# EAGLE board ghc-silk (EAGLE 7.6.0)
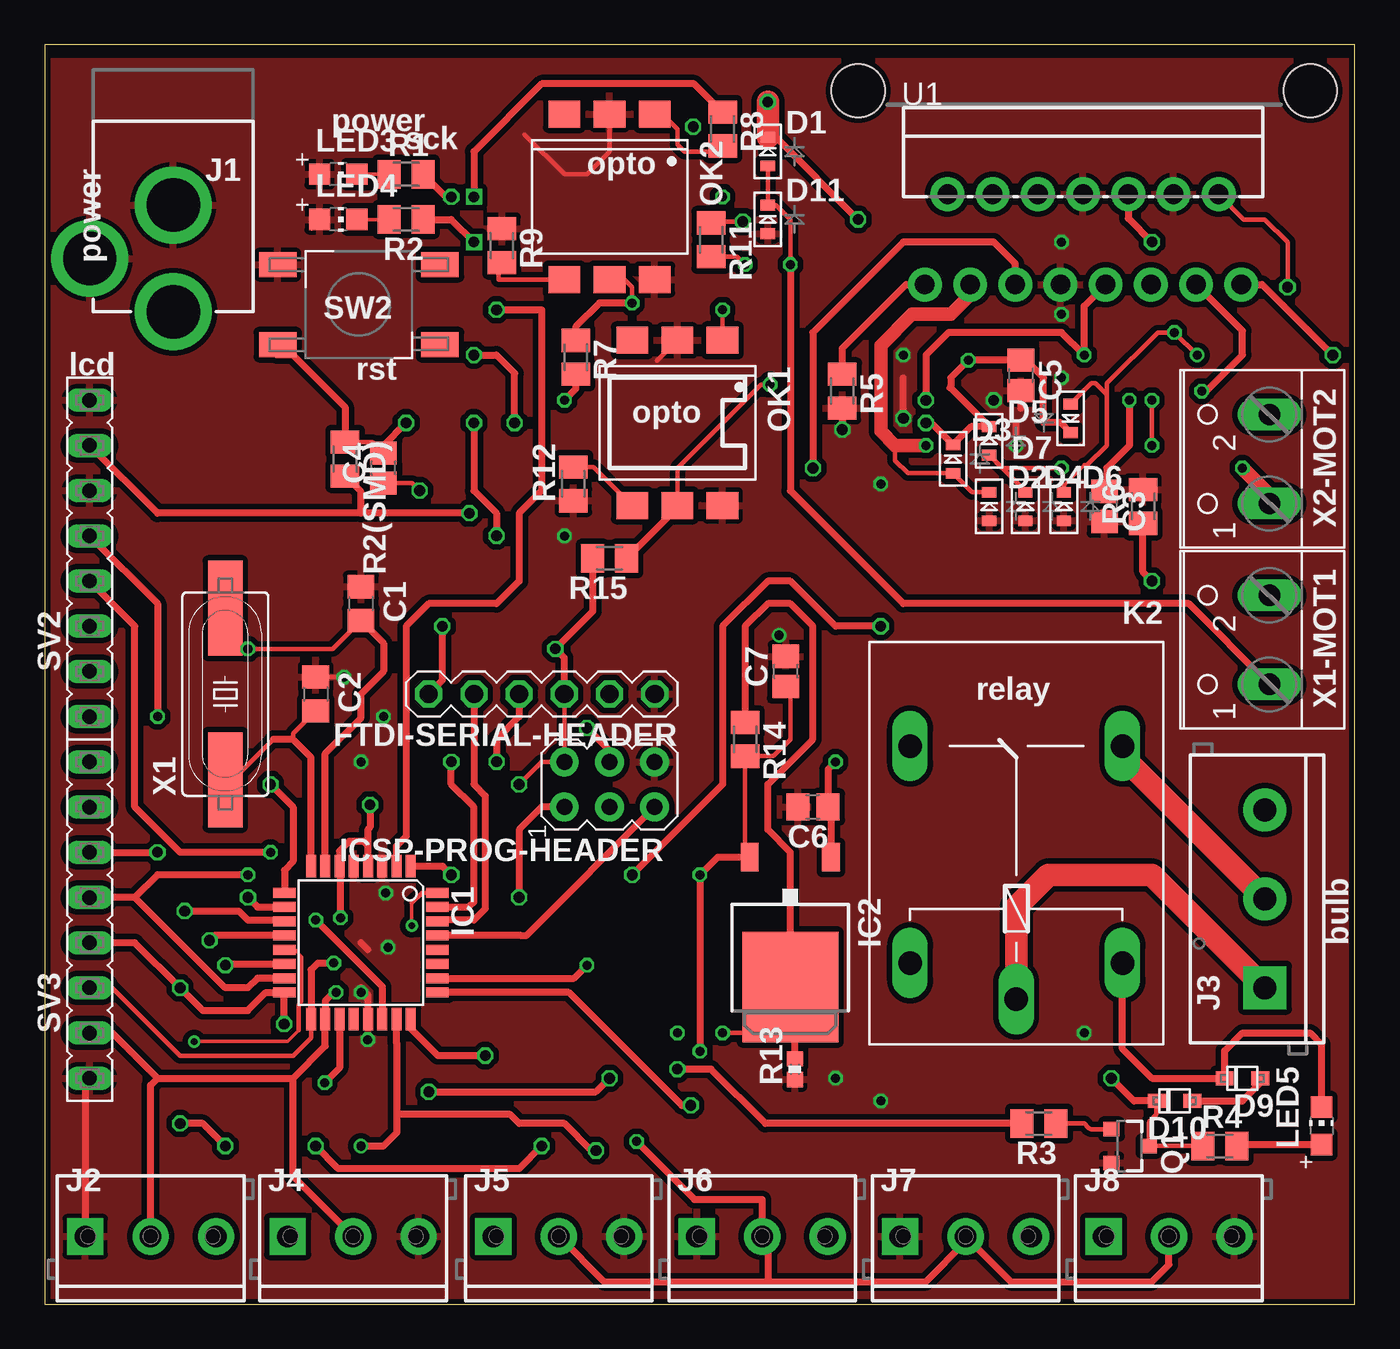
[diagram p0: board, top side]
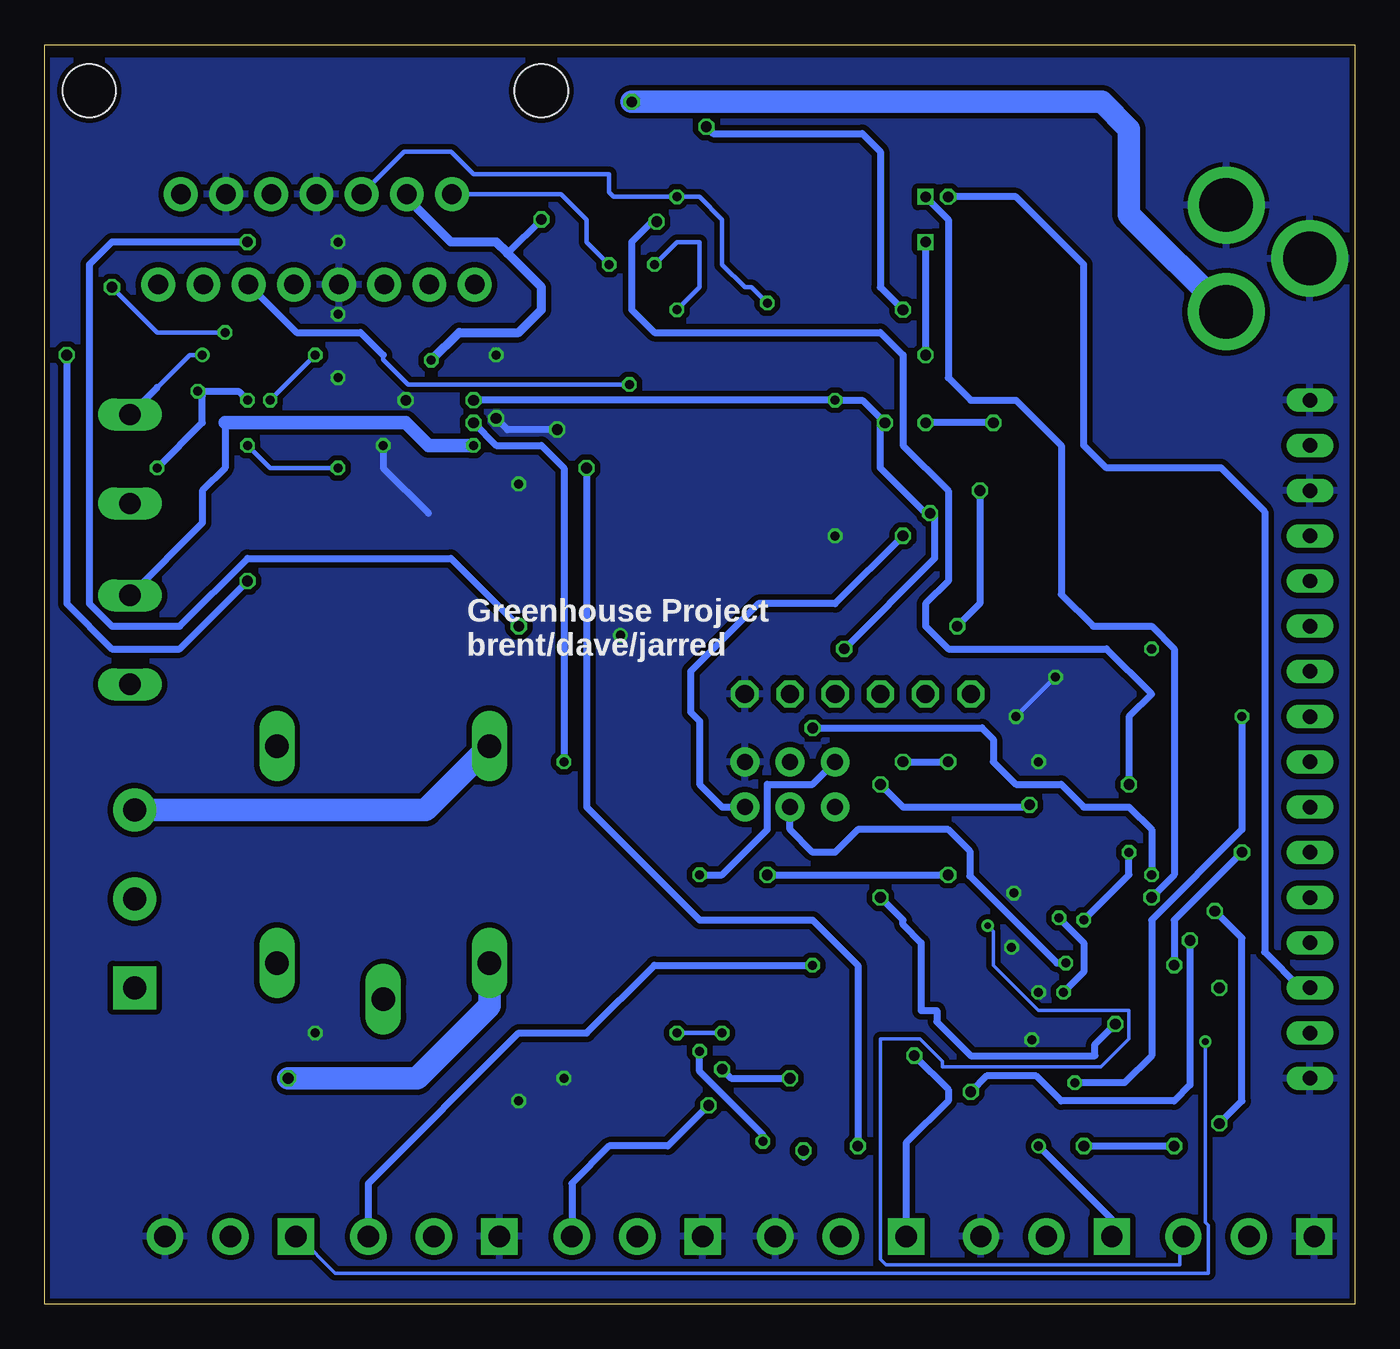
[diagram p1: board, bottom side, seen from below]

Size 73.64 x 70.79 mm. Coordinates in mm from the lower left corner, seen from the top.
Outline: 0,0 73.64,0 73.64,70.79 0,70.79 0,0
Copper layers (1*16): Top 0.035mm / dielectric 1.5mm / Bottom 0.035mm
Design rules "Dirty8TS *": minimum track width 8mil, minimum drill 15mil, track to track 8mil, track to pad 8mil, pad to pad 8mil, via to via 8mil, smd to smd 0mil, copper to edge 10mil, drill to drill 10mil, minimum pad ring 10mil, minimum via ring 6mil, stop-mask expansion 2mil, vias tented up to drill 25mil, thermal gap 10mil

## Footprints (pad centres in the part's own frame; a part is rotated, then mirrored left to right if it is on the bottom)
C0805 = smd 1.3 x 1.5: 1 -0.95,0; 2 0.95,0
C0805' = smd 1.3 x 1.5: 1 -0.85,0; 2 0.85,0
SOD-523 = smd 0.8 x 0.6: A 0,-0.8; K 0,0.8
SOD-323F = smd 1 x 0.8: A -1,0; C 1,0
06X1-PTH = drill 1.016 octagon: 1 -6.35,0; 2 -3.81,0; 3 -1.27,0; 4 1.27,0; 5 3.81,0; 6 6.35,0
TQFP32-08 = smd 1.27 x 0.559: 1 -4.293,2.8; 2 -4.293,2; 3 -4.293,1.2; 4 -4.293,0.4; 5 -4.293,-0.4; 6 -4.293,-1.2; 7 -4.293,-2; 8 -4.293,-2.8; 17 4.293,-2.8; 18 4.293,-2; 19 4.293,-1.2; 20 4.293,-0.4; 21 4.293,0.4; 22 4.293,1.2; 23 4.293,2; 24 4.293,2.8 | smd 0.559 x 1.27: 9 -2.8,-4.293; 10 -2,-4.293; 11 -1.2,-4.293; 12 -0.4,-4.293; 13 0.4,-4.293; 14 1.2,-4.293; 15 2,-4.293; 16 2.8,-4.293; 25 2.8,4.293; 26 2,4.293; 27 1.2,4.293; 28 0.4,4.293; 29 -0.4,4.293; 30 -1.2,4.293; 31 -2,4.293; 32 -2.8,4.293
TO252 = smd 1 x 1.6: 1 -2.28,-4.8; 2 2.28,-4.8 | smd 5.4 x 6.2: 3 0,2.5
AVRISP = drill 0.9 pad 1.626: 1 -1.27,2.54; 2 1.27,2.54; 3 -1.27,0; 4 1.27,0; 5 -1.27,-2.54; 6 1.27,-2.54
POWER_JACK_PTH = drill 2.997 pad 4.318: GND 0,7.7; GNDBREAK 4.7,10.7; PWR 0,13.7
SCREWTERMINAL-3.5MM-3_LOCK.007S = drill 1.2 pad 2.032 square: 1 -0.178,0 | drill 1.2 pad 2.032: 2 3.5,0; 3 7.178,0
SCREWTERMINAL-5MM-3 = drill 1.3 pad 2.413 square: 1 0,0 | drill 1.3 pad 2.413: 2 5,0; 3 10,0
G5LE = drill 1.321 long: 1 -7.493,-5.969; 2 -7.493,5.969; O 4.699,5.969; P -9.525,0; S 4.699,-5.969
CHIP-LED0805 = smd 1.2 x 1.2: A 0,-1.05; C 0,1.05
DIL6-SMD = smd 1.78 x 1.52: 1 -2.54,-4.645; 2 0,-4.645; 3 2.54,-4.645; 4 2.54,4.645; 5 0,4.645; 6 -2.54,4.645
SOT23-3 = smd 0.8 x 0.9: 1 -0.95,-1; 2 0.95,-1; 3 0,1.1
M0805 = smd 1.3 x 1.6: 1 -0.95,0; 2 0.95,0
0402-RES = smd 0.85 x 0.9: 1 -0.58,0; 2 0.58,0
FE08 = drill 0.813 long: 1 -8.89,0; 2 -6.35,0; 3 -3.81,0; 4 -1.27,0; 5 1.27,0; 6 3.81,0; 7 6.35,0; 8 8.89,0
SPST_NO_SMD = smd 2.108 x 1.397: 1 0,4.496; 2 9.119,4.496; 3 0,0; 4 9.119,0
MULTIWATT15_6400BGHEATSINK = drill 1.1 pad 1.9: 1 -8.95,-2.39; 2 -7.68,2.69; 3 -6.41,-2.39; 4 -5.14,2.69; 5 -3.87,-2.39; 6 -2.6,2.69; 7 -1.33,-2.39; 8 -0.06,2.69; 9 1.21,-2.39; 10 2.48,2.69; 11 3.75,-2.39; 12 5.02,2.69; 13 6.29,-2.39; 14 7.56,2.69; 15 8.83,-2.39 | hole 2.997: -12.7,8.509; 12.7,8.509
HC49UP = smd 5.334 x 1.93: 1 -4.826,0; 2 4.826,0
W237-102 = drill 1.194 long: 1 -2.5,-1.27; 2 2.5,-1.27

## Placement (x,y rotation side)
C1  20pF  [C0805]  17.78,39.37 270 top
C2  20pF  [C0805]  15.24,34.29 270 top
C3  1.0uF  [C0805']  59.56,44.83 270 top
C4  0.1uF  [C0805']  19.05,46.99 90 top
C5  1.0uF  [C0805']  54.86,52.2 270 top
C6  0.1uF  [C0805']  43.18,27.94 180 top
C7  0.1uF  [C0805']  41.66,35.56 90 top
D1  [SOD-523]  40.64,64.77 0 top
D2  [SOD-523]  53.09,44.83 0 top
D3  [SOD-523]  51.05,47.5 0 top
D4  [SOD-523]  55.12,44.83 0 top
D5  [SOD-523]  53.09,48.51 0 top
D6  [SOD-523]  57.28,44.83 0 top
D7  [SOD-523]  57.66,49.78 180 top
D9  1N4148  [SOD-323F]  67.31,12.7 180 top
D10  Zener  [SOD-323F]  63.5,11.43 180 top
D11  [SOD-523]  40.64,60.96 0 top
FTDI-SERIAL-HEADER  HEADER-06X1-MALE  [06X1-PTH]  27.94,34.29 180 top
IC1  ATMEGA168TQFP-08  [TQFP32-08]  17.78,20.32 270 top
IC2  7805DT  [TO252]  41.91,20.32 180 top
ICSP-PROG-HEADER  AVRISP-6  [AVRISP]  31.75,29.21 90 top
J1  POWER_JACKPTH  [POWER_JACK_PTH]  7.24,69.47 180 top
J2  [SCREWTERMINAL-3.5MM-3_LOCK.007S]  2.46,3.81 0 top
J3  [SCREWTERMINAL-5MM-3]  68.58,17.78 90 top
J4  [SCREWTERMINAL-3.5MM-3_LOCK.007S]  13.84,3.81 0 top
J5  [SCREWTERMINAL-3.5MM-3_LOCK.007S]  25.4,3.81 0 top
J6  [SCREWTERMINAL-3.5MM-3_LOCK.007S]  36.83,3.81 0 top
J7  [SCREWTERMINAL-3.5MM-3_LOCK.007S]  48.26,3.81 0 top
J8  [SCREWTERMINAL-3.5MM-3_LOCK.007S]  59.69,3.81 0 top
K2  G5LE  [G5LE]  54.61,26.67 90 top
LED3  [CHIP-LED0805]  16.51,63.5 270 top
LED4  [CHIP-LED0805]  16.51,60.96 270 top
LED5  [CHIP-LED0805]  71.75,10.03 0 top
OK1  4N27SM  [DIL6-SMD]  35.56,49.53 180 top
OK2  4N27SM  [DIL6-SMD]  31.75,62.23 180 top
Q1  MMBT2222A  [SOT23-3]  60.96,8.89 270 top
R1  150  [M0805]  20.32,63.5 0 top
R2  150  [M0805]  20.32,60.96 180 top
R2(SMD)  10k  [M0805]  16.89,47.5 270 top
R3  1k  [M0805]  55.88,10.16 180 top
R4  150  [M0805]  66.04,8.89 0 top
R5  10k  [M0805]  44.83,51.31 270 top
R6  10k  [M0805]  61.72,44.83 90 top
R7  1k  [M0805]  29.84,53.21 270 top
R8  240  [M0805]  38.1,66.04 270 top
R9  1k  [M0805]  25.7,59.49 270 top
R11  240  [M0805]  37.47,59.82 270 top
R12  1k  [M0805]  29.72,46.1 90 top
R13  3k  [0402-RES]  42.16,13.21 90 top
R14  1k  [M0805]  39.37,31.75 270 top
R15  1k  [M0805]  31.75,41.91 180 top
SV2  [FE08]  2.54,41.91 90 top
SV3  [FE08]  2.54,21.59 90 top
SW2  MOMENTARYBUTTON  [SPST_NO_SMD]  22.23,58.42 180 top
U1  L298HEATSINK  [MULTIWATT15_6400BGHEATSINK]  58.42,59.69 0 top
X1  [HC49UP]  10.16,34.29 90 top
X1-MOT1  [W237-102]  67.56,37.34 90 top
X2-MOT2  [W237-102]  67.56,47.5 90 top

## Library data of the parts
C1 C2 = resistor
C3-C7 D1-D7 D10 D11 ICSP-PROG-HEADER LED3-LED5 R1 R2 R2(SMD) R3-R9 R11 R12 R14 R15 = adafruit
D9 = adafruit; PROD_ID: DIO-08378
FTDI-SERIAL-HEADER = GeekAmmo; OTHER: 4UCON 00834; URL: http://www.4uconnector.com/online/SearchPro.asp?FormName=ProSearch&FormAction=search&s_GroupNo=&s_keyword=00834
IC1 = atmega328p
IC2 SW2 = ece388
J1 = SparkFun-Connectors; PROD_ID: CONN-08197
J2 J4-J8 = SparkFun-Connectors; PROD_ID: CONN-08288
J3 = SparkFun-Connectors; PROD_ID: CONN-10134; STOREFRONT_ID: PRT-08433
K2 = relay; OC_FARNELL: unknown; OC_NEWARK: unknown
OK1 OK2 = optocoupler; MF: FAIRCHILD SEMICONDUCTOR; MPN: 4N27S-M; OC_FARNELL: unknown; OC_NEWARK: 05C3300
Q1 = SparkFun-DiscreteSemi; PROD_ID: TRANS-08049
R13 = SparkFun-Resistors
SV2 SV3 = con-lsta; OC_FARNELL: unknown; OC_NEWARK: unknown
U1 = SparkFun-PowerIC
X1 = adafruit; OC_FARNELL: unknown; OC_NEWARK: unknown
X1-MOT1 X2-MOT2 = con-wago-500; MPN: 237-102; OC_FARNELL: unknown; OC_NEWARK: 70K9898

## Nets
+5V: C3.1 C7.1 FTDI-SERIAL-HEADER.3 IC1.4 IC1.6 IC1.18 IC2.2 ICSP-PROG-HEADER.2 J2.2 J4.2 J5.2 J6.2 J7.2 J8.2 R2(SMD).2 R2.1 R7.2 R14.2 R15.2 SV2.7 SV3.2 U1.9
+12V: C5.1 C6.1 D1.K D3.K D5.K D7.K IC2.1 J1.PWR U1.4
ADC6: IC1.19 SV2.5
ADC7: IC1.22 SV2.4
COIL: D10.C K2.2 Q1.3 R4.1
COMMON: J3.1 K2.P
CTS(DOESNTEXIST): FTDI-SERIAL-HEADER.2
DIODENODE: D9.A D10.A
DTR: C4.1 FTDI-SERIAL-HEADER.6
ENA: OK2.5 R7.1 U1.6
ENB: OK1.5 R15.1 U1.11
GND: C1.1 C2.1 C3.2 C5.2 C6.2 C7.2 D2.A D4.A D6.A D11.A FTDI-SERIAL-HEADER.1 IC1.3 IC1.5 IC1.21 ICSP-PROG-HEADER.6 J1.GND J1.GNDBREAK J2.1 J4.3 J5.3 J6.1 J7.1 J8.3 LED3.A LED4.A OK1.2 OK1.6 OK2.2 OK2.6 Q1.2 R5.2 R6.2 R9.1 R12.1 R13.1 SV2.6 SV2.8 SV3.1 SW2.4 U1.7 U1.8 U1.12
MISO: IC1.16 ICSP-PROG-HEADER.1 SV3.4
MOSI: IC1.15 ICSP-PROG-HEADER.4 SV3.5
N$1: OK2.1 R8.2
N$2: LED4.C R2.2
N$3: LED5.A R4.2
N$5: OK2.4 R9.2
N$6: Q1.1 R3.1
N$7: IC2.3 R13.2 R14.1
N$8: OK1.1 R11.2
N$10: LED3.C R1.1
N$11: C1.2 IC1.7 X1.2
N$13: C2.2 IC1.8 X1.1
N$15: OK1.4 R12.2
N$25: R5.1 U1.1
N$26: R6.1 U1.15
NC: J3.2 K2.S
NO: J3.3 K2.O
OUT1: D1.A D11.K U1.2 X1-MOT1.1
OUT2: D2.K D3.A U1.3 X1-MOT1.2
OUT3: D4.K D5.A U1.13 X2-MOT2.1
OUT4: D6.K D7.A U1.14 X2-MOT2.2
PB0: IC1.12 R3.2
PB1: IC1.13 J8.1
PB2: IC1.14 SV3.6
PC0: IC1.23 J4.1
PC1: IC1.24 J5.1
PC2: IC1.25 J6.3
PC3: IC1.26 J7.3
PC4: IC1.27
PC5: IC1.28
PD2: IC1.32 J2.3
PD3: IC1.1 U1.10
PD4: IC1.2
PD5: IC1.9 R11.1
PD6: IC1.10 R8.1
PD7: IC1.11 U1.5
RST: C4.2 IC1.29 ICSP-PROG-HEADER.5 R2(SMD).1 SW2.2
RX: FTDI-SERIAL-HEADER.5 IC1.30
SCK: IC1.17 ICSP-PROG-HEADER.3 R1.2 SV3.3
TX: FTDI-SERIAL-HEADER.4 IC1.31
VCC: D9.C K2.1 LED5.C

## Tracks (layer width: path | path; a pad name or v marks a point on that pad's centre or on a via)
+5V  (via drill 0.51, 0.6)
  Top 0.254: v26.67,29.21 27.94,30.48 ICSP-PROG-HEADER.2 FTDI-SERIAL-HEADER.3 | IC2.2 39.37,25.38 R14.2 40.96,30.8 41.91,31.75 41.91,34.46 C7.1
  Top 0.406: v23.88,44.45 17.78,44.45 | 18.16,25.78 17.91,26.04 17.14,26.04 16.58,25.47 IC1.6 | 18.16,25.78 18.16,24.63 IC1.4 18.18,25.8 | IC2.2 37.82,25.12 v36.83,24.13 v36.83,14.22 | 18.16,25.78 18.16,26.67 18.29,26.8 v18.29,28.07 | FTDI-SERIAL-HEADER.3 29.21,36.32 v28.7,36.83 30.8,38.93 R15.2 | 17.78,44.45 17.78,45.66 R2(SMD).2 | R2.1 22.86,60.96 v24.13,59.69 | v24.13,53.34 25.4,53.34 26.42,52.32 v26.42,49.53 | v60.96,50.8 60.96,48.26 59.69,46.99 59.69,45.81 C3.1 | R7.2 29.84,51.44 v29.21,50.8 | 13.97,12.7 15.78,14.51 IC1.18 15.78,17.05 16.26,17.53 v16.38,17.53 | 6.35,12.7 13.97,12.7 | IC1.6 16.51,24.54 | v16.64,21.72 16.64,24.56 IC1.6 | 40.64,1.27 40.64,3.5 J6.2 40.33,5.9 36.52,5.9 v33.27,9.14 | 40.64,1.27 49.53,1.27 51.76,3.5 J7.2 54.3,1.27 62.23,1.27 63.19,2.23 J8.2 | J5.2 31.44,1.27 40.64,1.27 | J4.2 13.97,7.18 13.97,12.7 | SV3.2 3.81,15.24 6.35,12.7 | 17.78,44.45 6.35,44.45 SV2.7 | J2.2 5.96,12.31 6.35,12.7 | U1.9 58.42,56.09 v58.42,53.34 57.15,54.61 50.8,54.61 49.53,53.34 v49.53,50.8
  Bottom 0.254: v60.96,50.8 v58.42,53.34
  Bottom 0.406: v28.7,36.83 23.62,41.91 23.62,44.2 v23.88,44.45 24.13,44.45 26.67,46.99 26.67,49.28 v26.42,49.53 27.69,50.8 v29.21,50.8 v49.53,50.8 | v36.83,14.22 36.83,13.08 33.27,9.53 v33.27,9.14 | v24.13,59.69 v24.13,53.34 | ICSP-PROG-HEADER.2 30.48,29.21 33.02,29.21 33.02,26.67 35.56,24.13 v36.83,24.13 | v16.64,21.72 15.24,20.32 15.24,18.67 v16.38,17.53 | v26.67,29.21 25.4,27.94 18.41,27.94 v18.29,28.07
+12V  (via drill 0.51, 0.6)
  Top 0.254: 50.93,51.6 50.8,51.47 50.93,51.47 | 55.16,53.05 C5.1
  Top 0.406: v49.53,49.53 49.82,49.53 D3.K 52.07,49.31 D5.K 50.93,51.47 | 50.93,51.6 50.93,52.07 v51.9,53.05 C5.1 | D7.K 57.11,49.53 56.13,49.53 56.13,52.07 55.16,53.05 | IC2.1 44.19,27.78 C6.1 44.03,30.06 v44.45,30.48 | D1.K 41.11,65.57 v45.72,60.96
  Top 1.27: v40.64,67.56 D1.K
  Bottom 0.406: v49.53,49.53 48.26,48.26 45.72,48.26 44.45,46.99 v44.45,30.48 | v45.72,60.96 47.62,59.05
  Bottom 0.508: v51.9,53.05 50.34,54.61 46.99,54.61 45.72,55.88 45.72,57.15 47.62,59.05 48.26,59.69 50.8,59.69 53.28,62.17 U1.4
  Bottom 1.27: v40.64,67.56 14.22,67.56 12.7,66.04 12.7,61.23 J1.PWR
ADC6  (via drill 0.51)
  Top 0.406: IC1.19 16.58,13.28 v15.75,12.45 | SV2.5 6.35,39.37 v6.35,33.02
  Bottom 0.406: v6.35,33.02 6.35,26.67 11.43,21.59 11.43,13.97 12.95,12.45 v15.75,12.45
ADC7  (via drill 0.51)
  Top 0.406: v15.24,21.59 18.98,17.85 IC1.22 | v12.7,25.4 7.62,25.4 5.08,27.94 5.08,38.1 SV2.4
  Bottom 0.406: v15.24,21.59 12.7,24.13 v12.7,25.4
COIL  (via drill 0.6)
  Top 0.254: R4.1 Q1.3 62.06,10.14 arc-45 62.13,10.32 62.48,10.67 62.48,11.39 arc-45 D10.C
  Top 0.406: D10.C 61.21,11.43 v59.94,12.7
  Bottom 1.27: v59.94,12.7 52.71,12.7 48.64,16.77 K2.2
COMMON
  Top 1.27: K2.P 54.61,22.33 56.41,24.13 62.23,24.13 J3.1
DIODENODE
  Top 0.406: D10.A 67.31,11.43 68.31,12.43 D9.A
DTR  (via drill 0.6)
  Top 0.254: C4.1 20.66,46.14 v21.08,45.72
  Top 0.406: v22.35,38.1 22.35,35.05 FTDI-SERIAL-HEADER.6
  Bottom 0.406: v21.08,45.72 21.08,39.37 v22.35,38.1
ENA  (via drill 0.51)
  Top 0.254: OK2.5 32.59,57.59 33.02,57.15 v33.02,56.26
  Top 0.406: v33.02,56.26 31.18,56.26 29.84,54.92 R7.1
  Bottom 0.254: v33.02,56.26 33.91,57.15 34.29,57.15 35.56,58.42 35.56,60.96 36.83,62.23 v38.1,62.23 41.66,62.23 41.91,62.48 41.91,63.5 49.53,63.5 50.8,64.77 53.43,64.77 U1.6
ENB  (via drill 0.51)
  Top 0.254: OK1.5 35.56,46.99 40.26,51.69 v40.77,51.69
  Top 0.406: OK1.5 35.56,44.77 R15.1
  Bottom 0.254: v40.77,51.69 53.21,51.69 54.61,53.09 54.61,53.34
  Bottom 0.406: U1.11 59.48,54.61 55.88,54.61 54.61,53.34
GND  (via drill 0.51, 0.6)
  Top 0.203: LED4.A 15.09,60.59 arc45 15.01,60.41
  Top 0.254: 59.51,44.03 C3.2 | OK2.2 31.75,64.77 30.48,63.5 29.21,63.5 26.99,65.72 | 34.41,53.02 OK1.2 | C2.1 v16.83,35.24
  Top 0.406: 54.86,50.33 C5.2 54.61,51.09 | LED3.A 15.24,63.72 | J5.3 33.02,3.81 | v54.61,48.26 54.61,49.53 | v17.78,17.53 18.18,17.13 | IC1.21 18.18,17.13 | 18.18,17.13 18.18,17.38 17.78,17.78 | 18.16,19.94 17.78,20.32 | SV3.1 2.29,12.7 J2.1 | R5.2 v44.83,49.15 | v48.26,49.78 48.26,52.07
  Bottom 0.254: v16.83,35.24 v19.05,33.02
  Bottom 0.406: v54.61,48.26 54.61,46.99 52.07,44.45 | v44.83,49.15 47.62,49.15 v48.26,49.78
  other vias: 53.34,50.8 58.42,15.24 29.21,43.18 19.18,23.11 19.3,20.07 46.99,11.43 17.78,30.48 57.15,52.07 57.15,59.69 57.15,55.63 44.45,12.7 41.27,37.59 18.16,14.86 48.26,53.34 46.99,46.1
  pour Top (isolate 0.305): 0,69.85 73.66,69.85 73.66,0 0,0
  pour Bottom (isolate 0.305): 0,69.85 73.66,69.85 73.66,0 0,0
MISO  (via drill 0.6)
  Top 0.406: ICSP-PROG-HEADER.1 27.94,27.94 26.67,26.67 v26.67,22.86 | v13.46,15.75 13.46,17.5 IC1.16 12.44,17.52 11.43,16.51 8.89,16.51 v7.62,17.78 5.08,20.32 SV3.4 3.81,20.32
  Bottom 0.406: v13.46,15.75 14.61,14.61 14.61,13.97 21.59,13.97 23.5,15.88 23.5,16.51 24.38,16.51 24.38,20.32 25.4,21.34 25.4,21.59 v26.67,22.86
MOSI  (via drill 0.51, 0.6)
  Top 0.406: ICSP-PROG-HEADER.4 31.75,31.11 v30.48,32.38 | 5.08,22.86 10.16,17.78 11.43,17.78 11.97,18.32 IC1.15 | 5.08,22.86 SV3.5 | v11.43,24.13 6.35,24.13 5.08,22.86
  Bottom 0.406: v30.48,32.38 20.95,32.38 20.32,31.75 20.32,30.48 19.05,29.21 16.51,29.21 15.24,27.94 12.7,27.94 11.43,26.67 v11.43,24.13
N$1
  Top 0.254: R8.2 37.78,64.77 35.96,64.77 35.56,65.17 35.56,66.04 34.73,66.88 OK2.1
N$2
  Top 0.203: LED4.C R2.2
N$3
  Top 0.406: R4.2 67.08,8.98 LED5.A
N$5
  Top 0.254: OK2.4 25.52,57.59 25.52,58.35 R9.2
N$6
  Top 0.254: Q1.1 58.84,9.84 arc-45 58.67,9.91 58.42,10.16 R3.1
N$7  (via drill 0.51)
  Top 0.254: v38.1,15.24 39.33,15.24 41.26,17.16 IC2.3
  Top 0.406: 41.91,16.51 41.26,17.16 | 39.05,33.02 R14.1 39.37,38.1 40.64,39.37 41.91,39.37 43.18,38.1 43.18,31.75 40.64,29.21 40.64,26.67 41.91,25.4 IC2.3 42.16,17.57 R13.2
  Bottom 0.254: v35.56,15.24 v38.1,15.24
N$8  (via drill 0.51)
  Top 0.254: OK1.1 v38.1,55.88 | v39.37,58.42 38.92,58.87 R11.2
  Bottom 0.254: v38.1,55.88 36.83,57.15 36.83,59.69 38.1,59.69 v39.37,58.42
N$10
  Top 0.203: LED3.C R1.1
N$11  (via drill 0.51)
  Top 0.254: C1.2 16.19,36.83 v11.43,36.83 10.16,36.83 X1.2
  Top 0.406: IC1.7 15.78,30.95 17.78,32.95 17.78,34.29 19.05,35.56 19.05,37.15 C1.2
N$13
  Top 0.254: 12.86,31.75 10.57,29.46 | C2.2 13.97,32.07 13.97,31.75
  Top 0.406: IC1.8 14.98,30.74 13.97,31.75 12.86,31.75 | 10.57,29.46 X1.1
N$15
  Top 0.254: R12.2 30.85,47.05 OK1.4
N$25
  Top 0.406: R5.1 44.83,53.72 48.41,57.3 U1.1
N$26  (via drill 0.6)
  Top 0.406: U1.15 68.43,57.3 v72.39,53.34 | v62.23,40.64 61.72,41.15 R6.1
  Bottom 0.406: v72.39,53.34 72.39,39.37 69.85,36.83 66.04,36.83 v62.23,40.64
NC
  Top 1.27: J3.2 60.58,30.78 K2.S
NO
  Bottom 1.27: J3.3 52.23,27.78 K2.O
OUT1  (via drill 0.51)
  Top 0.254: D1.A D11.K 41.11,61.76 41.91,60.96 v41.91,58.42
  Top 0.406: X1-MOT1.1 64.3,39.37 48.26,39.37 41.91,45.72 v41.91,58.42
  Bottom 0.254: U1.2 44.6,62.38 43.18,60.96 43.18,59.69 v41.91,58.42
OUT2  (via drill 0.51)
  Top 0.254: D2.K 52.12,45.63 D3.A 48.51,46.7 47.79,47.42 47.79,48.26
  Top 0.762: v49.53,48.26 47.79,48.26 46.99,49.06 46.99,53.87 48.75,55.63 50.93,55.63 52.01,56.71 U1.3
  Bottom 0.254: X1-MOT1.2 68.79,39.88
  Bottom 0.406: 63.5,49.53 63.5,46.99 64.77,45.72 64.77,43.9 X1-MOT1.2
  Bottom 0.762: 63.5,49.53 53.34,49.53 52.07,48.26 v49.53,48.26
OUT3  (via drill 0.51)
  Top 0.254: D4.K 55.12,45.68 D5.A 53.81,46.99 v57.15,46.99 | v62.23,48.26 v62.23,50.8
  Top 0.406: v65.02,51.31 65.28,51.31 67.31,53.34 67.31,54.7 U1.13
  Top 0.813: X2-MOT2.1 68.83,45.47 v67.31,46.99
  Bottom 0.254: v62.23,48.26 60.96,46.99 v57.15,46.99
  Bottom 0.406: v62.23,50.8 62.74,51.31 v65.02,51.31 64.77,51.05 64.77,49.53 v67.31,46.99
OUT4  (via drill 0.51, 0.6)
  Top 0.203: 58.42,47.15 57.31,46.04
  Top 0.254: 57.7,50.55 D7.A 58.83,51.75 59.05,51.75 59.69,51.12 | 57.31,46.04 57.28,46.01 D6.K | 59.69,51.12 59.69,48.26 58.58,47.15 58.42,47.15 | 59.69,51.12 59.69,51.75 62.55,54.61 v63.5,54.61 v64.77,53.34 | v69.85,57.15 69.85,59.69 68.58,60.96 67.4,60.96 U1.14
  Bottom 0.254: v64.77,53.34 65.49,53.34 67.31,51.52 | v63.5,54.61 67.31,54.61 v69.85,57.15
  Bottom 0.406: 67.31,51.52 X2-MOT2.2
PB0  (via drill 0.6)
  Top 0.406: IC1.12 9.54,20.72 v9.27,20.45 | v21.59,11.94 30.99,11.94 v31.75,12.7 | R3.2 40.51,10.16 37.47,13.21 v35.56,13.21
  Bottom 0.406: v21.59,11.94 20.7,12.83 17.91,12.83 16.51,11.43 10.16,11.43 9.27,12.32 v9.27,20.45 | v35.56,13.21 35.05,12.7 v31.75,12.7
PB1  (via drill 0.38)
  Top 0.203: 14.29,15.4 13.65,14.76 v8.41,14.76 | 14.13,19.84 14.45,19.53 14.45,16.99 14.29,16.83
  Top 0.254: 14.29,15.4 14.29,16.83 | 14.13,19.84 13.56,19.84 IC1.13
  Bottom 0.203: v8.41,14.76 8.41,4.6 8.26,4.45 8.26,1.75 57.31,1.75 59.37,3.81 J8.1
PB2  (via drill 0.6)
  Top 0.406: SV3.6 v6.35,25.4 | v10.16,19.05 10.23,19.12 IC1.14
  Bottom 0.406: v6.35,25.4 10.16,21.59 v10.16,19.05
PC0  (via drill 0.51, 0.6)
  Top 0.406: 19.81,10.67 26.16,10.67 26.67,10.16 29.21,10.16 30.73,8.64 v30.99,8.64 | IC1.23 19.78,14.7 19.81,14.67 19.81,10.67 | v17.78,8.89 19.05,8.89 19.81,9.65 19.81,10.67
  Bottom 0.406: 30.99,8.28 v30.99,8.64 | J4.1 13.66,4.78 v17.78,8.89
PC1  (via drill 0.6)
  Top 0.406: IC1.24 20.58,15.5 22.11,13.97 v24.77,13.97
  Bottom 0.406: v24.77,13.97 22.86,12.06 22.86,11.43 25.22,9.07 J5.1
PC2  (via drill 0.6)
  Top 0.406: v36.32,11.18 35.81,11.18 29.47,17.52 IC1.25
  Bottom 0.406: v36.32,11.18 38.61,8.89 41.91,8.89 44.01,6.79 J6.3
PC3  (via drill 0.51)
  Top 0.406: IC1.26 29.75,18.32 v30.48,19.05
  Bottom 0.406: v30.48,19.05 39.37,19.05 43.18,15.24 46.99,15.24 55.44,6.79 J7.3
PD2  (via drill 0.38)
  Top 0.203: v20.64,21.27 20.64,22.54
  Top 0.254: 20.64,22.54 21.21,23.12 IC1.32
  Bottom 0.203: v20.64,21.27 20.32,20.95 20.32,19.05 17.78,16.51 12.7,16.51 12.7,14.92 14.29,13.34 23.18,13.34 23.18,13.65 24.45,14.92 26.67,14.92 26.67,2.54 26.35,2.22 9.84,2.22 9.84,3.81 J2.3
PD3  (via drill 0.6)
  Top 0.406: U1.10 60.9,61.02 v62.23,59.69 | v46.99,38.1 44.45,38.1 41.91,40.64 40.64,40.64 38.1,38.1 38.1,29.21 v33.02,24.13 | v22.86,24.13 22.38,24.61 IC1.1
  Bottom 0.406: v62.23,59.69 69.85,59.69 71.12,58.42 71.12,39.37 69.85,38.1 66.04,38.1 62.23,41.91 50.8,41.91 v46.99,38.1 | v33.02,24.13 v22.86,24.13
PD4  (via drill 0.6)
  Top 0.406: IC1.2 19.78,25.75 20.32,26.29 20.32,38.1 21.59,39.37 25.4,39.37 26.67,40.64 26.67,44.45 27.94,45.72 27.94,55.88 v25.4,55.88
  Bottom 0.406: v36.45,66.17 36.07,65.79 27.69,65.79 26.67,64.77 26.67,57.15 v25.4,55.88
PD5  (via drill 0.6)
  Top 0.254: R11.1 37.53,60.83 v39.24,60.83
  Top 0.406: v12.7,29.21 13.97,27.94 13.97,24.87 13.49,24.39 IC1.9
  Bottom 0.406: v39.24,60.83 39.5,60.83 40.64,59.69 40.64,55.88 39.37,54.61 26.67,54.61 25.4,53.34 25.4,48.26 22.86,45.72 22.86,40.64 24.13,39.37 24.13,38.1 22.86,36.83 13.97,36.83 11.43,34.29 12.7,33.02 v12.7,29.21
PD6  (via drill 0.6)
  Top 0.406: 37.78,67.31 R8.1 36.51,68.58 27.94,68.58 24.13,64.77 v24.13,62.23 | v11.43,22.86 11.97,22.32 IC1.10
  Bottom 0.406: v24.13,62.23 22.86,60.96 22.86,52.07 21.59,50.8 19.05,50.8 16.51,48.26 16.51,39.9 14.71,38.1 11.43,38.1 10.16,36.83 10.16,24.13 v11.43,22.86
PD7  (via drill 0.6)
  Top 0.406: U1.5 54.55,58.48 53.34,59.69 48.26,59.69 43.18,54.61 v43.18,46.99 | v27.94,8.89 26.67,7.62 16.51,7.62 v15.24,8.89 | v10.16,8.89 8.89,10.16 v7.62,10.16 | v7.87,22.1 10.92,22.1 11.43,21.59 13.42,21.59 IC1.11
  Bottom 0.406: v43.18,46.99 43.18,27.94 36.83,21.59 30.48,21.59 27.94,19.05 v27.94,8.89 | v15.24,8.89 v10.16,8.89 | v7.62,10.16 6.35,11.43 6.35,20.57 v7.87,22.1
RST  (via drill 0.6)
  Top 0.254: R2(SMD).1 18.44,48.45 C4.2 | 13.06,53.34 13.06,53.87 SW2.2
  Top 0.406: 18.95,47.94 C4.2 19.05,48.26 v20.32,49.53 | R2(SMD).1 16.89,50.42 13.97,53.34 13.06,53.34 | v24.13,49.53 24.13,45.72 25.4,44.45 v25.4,43.18 | 22.09,20.7 IC1.29 26.78,20.72 26.8,20.7 27.05,20.7 ICSP-PROG-HEADER.5
  Bottom 0.406: v20.32,49.53 v24.13,49.53 | v25.4,43.18 29.21,39.37 33.53,39.37 37.34,35.56 37.34,33.27 36.83,32.77 36.83,29.21 35.56,27.94 ICSP-PROG-HEADER.5
RX
  Top 0.406: IC1.30 22.14,21.59 24.13,21.59 24.77,22.23 24.77,28.57 24.13,29.21 FTDI-SERIAL-HEADER.5
SCK  (via drill 0.51, 0.6)
  Top 0.254: IC1.17 14.98,14.98 13.97,13.97 7.62,13.97 3.81,17.78 SV3.3
  Top 0.406: v22.86,62.23 22.54,62.23 R1.2 | IC1.17 14.98,18.79 15.37,19.18 v16.26,19.18
  Bottom 0.406: v22.86,62.23 19.05,62.23 15.24,58.42 15.24,48.26 13.97,46.99 7.53,46.99 5.08,44.54 5.08,19.79 3.07,17.78 SV3.3 | ICSP-PROG-HEADER.3 31.75,26.67 30.48,25.4 29.21,25.4 27.94,26.67 22.86,26.67 21.65,25.46 21.65,24.07 16.76,19.18 v16.26,19.18
TX  (via drill 0.6)
  Top 0.406: FTDI-SERIAL-HEADER.4 26.67,33.02 25.4,31.75 v25.4,30.48 | 22.17,22.23 IC1.31 23.84,22.32 24.13,22.61 24.13,27.94 22.86,29.21 v22.86,30.48
  Bottom 0.406: v25.4,30.48 v22.86,30.48
VCC
  Top 0.406: LED5.C 71.75,14.61 71.12,15.24 67.31,15.24 66.31,14.24 D9.C 62.23,12.7 60.58,14.35 K2.1

## Text on the board
tPlace: power | sck | power | opto | rst | lcd | opto | relay | bulb
bPlace: Greenhouse Project / brent/dave/jarred